# Altium PCB ESC.PcbDoc (part 2 of 3)
Units mm, origin at the board's own origin, x right, y up, seen from the top; angles counter-clockwise.
Board outline 60 x 40 mm, 4 copper layers (L1-SIGNAL/PWR, L2-GND, L3-PWR, L4-SIGNAL/PWR), stack 1.571 mm thick; 124 components, 80 nets, 417 pads, 463 vias.
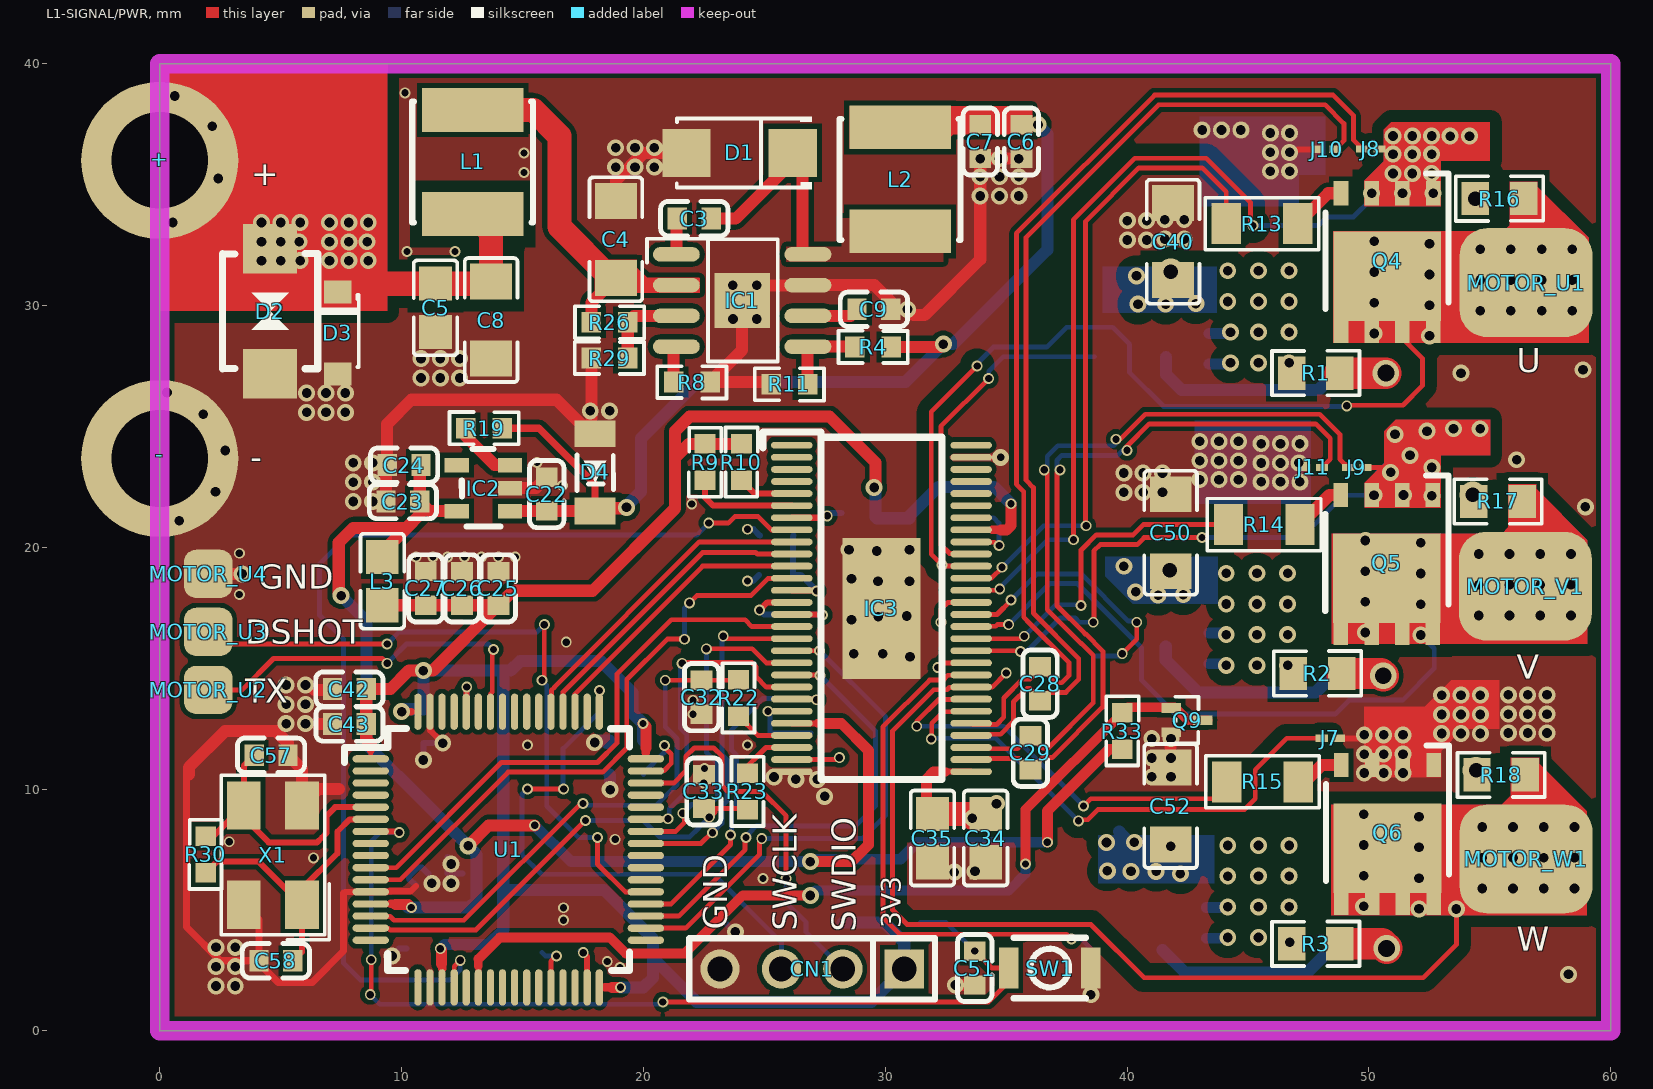
[diagram p0: L1-SIGNAL/PWR view]

## Via types
v1: diameter 0.7, hole 0.4, L1-SIGNAL/PWR to L4-SIGNAL/PWR, tented both sides, 336 vias
v2: diameter 0.45, hole 0.3, L1-SIGNAL/PWR to L4-SIGNAL/PWR, tented both sides, 118 vias
v3: diameter 1.1, hole 0.6, L1-SIGNAL/PWR to L4-SIGNAL/PWR, tented both sides, 5 vias
v4: diameter 1.1, hole 0.7, L1-SIGNAL/PWR to L4-SIGNAL/PWR, tented both sides, 3 vias
v5: diameter 0.7, hole 0.3, L1-SIGNAL/PWR to L4-SIGNAL/PWR, tented both sides, 1 vias

## Nets (pads, with @x,y where several pads share a name; then routed paths per layer and width w, separated by ;. In a path a pad name is that pad's centre, name@x,y a point inside that pad or via, vN(x,y) a via of type N, cw(c..) or ccw(c..) an arc to the next point about the centre after c; other vN are vias at no path point) (continued)
GL_C: (continued)
  L1-SIGNAL/PWR w0.2: v2(31.3,12.6) 31.3,12.8 32.204,13.704 32.678,13.704 33.534,13.704 IC3.35@33.549,13.72 ; v2(38.2,9.3) 38.5,9.6 43.617,9.6 44.121,10.104 R15.1@44.121,10.3
  L4-SIGNAL/PWR w0.2: v2(31.3,12.6) 34.9,12.6 v2(38.2,9.3)